# EAGLE board circuito005 (EAGLE 7.6.0)

Size 56.82 x 53.33 mm. Coordinates in mm from the lower left corner, seen from the top.
Outline: 0,0 56.82,0 56.82,53.33 0,53.33 0,0
Copper layers (1*16): Top 0.035mm / dielectric 1.5mm / Bottom 0.035mm
Design rules "default": minimum track width 10mil, minimum drill 24mil, track to track 8mil, track to pad 8mil, pad to pad 8mil, via to via 8mil, smd to smd 8mil, copper to edge 40mil, drill to drill 8mil, minimum pad ring 10mil, minimum via ring 8mil, stop-mask expansion 4mil, vias tented up to drill 0mil, thermal gap 10mil

## Footprints (pad centres in the part's own frame; a part is rotated, then mirrored left to right if it is on the bottom)
LED5MM = drill 0.813 octagon: A -1.27,0; K 1.27,0
2P-2.54-65/35MIL = drill 0.889 pad 1.651 square: 1 0,1.27 | drill 0.889 pad 1.651: 2 0,-1.27
0207/10 = drill 0.813 octagon: 1 -5.08,0; 2 5.08,0
DIP06YL = drill 0.813 long: 1 -6.35,-3.81; 2 -3.81,-3.81; 3 -1.27,-3.81; 4 1.27,-3.81; 5 3.81,-3.81; 6 6.35,-3.81; 7 6.35,3.81; 8 3.81,3.81; 9 1.27,3.81; 10 -1.27,3.81; 11 -3.81,3.81; 12 -6.35,3.81
DIL14 = drill 0.813 long: 1 -7.62,-3.81; 2 -5.08,-3.81; 3 -2.54,-3.81; 4 0,-3.81; 5 2.54,-3.81; 6 5.08,-3.81; 7 7.62,-3.81; 8 7.62,3.81; 9 5.08,3.81; 10 2.54,3.81; 11 0,3.81; 12 -2.54,3.81; 13 -5.08,3.81; 14 -7.62,3.81

## Placement (x,y rotation side)
D1  [LED5MM]  5,35.48 0 top
D2  [LED5MM]  5,111.68 0 top  (outside the outline)
D3  [LED5MM]  5,137.08 0 top  (outside the outline)
D4  [LED5MM]  5,162.48 0 top  (outside the outline)
D5  [LED5MM]  5,187.88 0 top  (outside the outline)
D6  [LED5MM]  5,213.28 0 top  (outside the outline)
P1  5V  [2P-2.54-65/35MIL]  5,10.08 0 top
R1  1k‎Ω  [0207/10]  5,124.38 0 top  (outside the outline)
R2  1k‎Ω  [0207/10]  5,22.78 0 top
R3  1k‎Ω  [0207/10]  5,48.18 0 top
R4  1k‎Ω  [0207/10]  5,149.78 0 top  (outside the outline)
R5  1k‎Ω  [0207/10]  5,175.18 0 top  (outside the outline)
R6  1k‎Ω  [0207/10]  5,200.58 0 top  (outside the outline)
R7  1k‎Ω  [0207/10]  5,225.98 0 top  (outside the outline)
SW2  [DIP06YL]  5,73.58 0 top  (outside the outline)
U1  [DIL14]  5,86.28 0 top  (outside the outline)
U2  [DIL14]  5,60.88 0 top  (outside the outline)
U3  [DIL14]  5,98.98 0 top  (outside the outline)

## Library data of the parts
D1-D6 P1 R1-R7 SW2 U1-U3 = AUTODESK_CIRCUITS_BREADBOARD

## Nets
N$1: P1.2 R3.2 U1.14 U2.14 U3.14
N$2: D1.K D2.K D3.K D4.K D5.K D6.K P1.1 U1.7 U2.7 U3.7
N$3: D1.A R2.2
N$4: R3.1 SW2.7 SW2.8 SW2.12
N$5: SW2.6 U1.3 U1.11 U2.3 U2.11 U3.3 U3.11
N$6: SW2.1 U2.2
N$7: R2.1 U2.5 U2.12
N$8: R1.1 U1.2 U2.9
N$9: R4.1 U1.5 U1.12
N$10: R5.1 U1.9 U3.2
N$11: R6.1 U3.5 U3.12
N$12: D2.A R1.2
N$13: D3.A R4.2
N$14: D4.A R5.2
N$15: D5.A R6.2
N$16: D6.A R7.2
N$17: R7.1 U3.9
N$18: SW2.5 U1.1 U1.4 U1.10 U1.13 U2.1 U2.4 U2.10 U2.13 U3.1 U3.4 U3.10 U3.13

## Tracks (layer width: path | path; a pad name or v marks a point on that pad's centre or on a via)
N$1  (4 unrouted)
N$2  (9 unrouted)
N$3  (1 unrouted)
N$4  (3 unrouted)
N$5  (6 unrouted)
N$6  (1 unrouted)
N$7  (2 unrouted)
N$8  (2 unrouted)
N$9  (2 unrouted)
N$10  (2 unrouted)
N$11  (2 unrouted)
N$12  (1 unrouted)
N$13  (1 unrouted)
N$14  (1 unrouted)
N$15  (1 unrouted)
N$16  (1 unrouted)
N$17  (1 unrouted)
N$18  (12 unrouted)